# EAGLE board team6 (EAGLE 8.4.1)

Size 100 x 80 mm. Coordinates in mm from the lower left corner, seen from the top.
Outline: 100,80 0,80
Outline: 0,0 1.5,0 1.5,2 4.5,2 4.5,0 42.5,0 42.5,2 45.5,2 45.5,0 47,0 47,28 45.5,28 45.5,26 42.5,26 42.5,28 4.5,28 4.5,26 1.5,26 1.5,28 0,28 0,0
Copper layers (1*16): Top 0.035mm / dielectric 1.5mm / Bottom 0.035mm
Design rules "default": minimum track width 6mil, minimum drill 0.35mm, track to track 6mil, track to pad 6mil, pad to pad 6mil, via to via 6mil, smd to smd 6mil, copper to edge 40mil, drill to drill 6mil, minimum pad ring 10mil, minimum via ring 8mil, stop-mask expansion 4mil, vias tented up to drill 0mil, thermal gap 10mil

## Footprints (pad centres in the part's own frame; a part is rotated, then mirrored left to right if it is on the bottom)
C1206 = smd 1.6 x 1.8: 1 -1.4,0; 2 1.4,0
C1206' = smd 1.8 x 1.45: 1 0,1.4; 2 0,-1.4
C0603 = smd 1 x 0.95: 1 0,0.8; 2 0,-0.8
RCL_C1206 = smd 1.6 x 1.8: 1 -1.4,0; 2 1.4,0
SMB = smd 2.4 x 2.4: A 2.2,0; C -2.2,0
MSOP8 = smd 0.35 x 1: 1 -0.975,-2.05; 2 -0.325,-2.05; 3 0.325,-2.05; 4 0.975,-2.05; 5 0.975,2.05; 6 0.325,2.05; 7 -0.325,2.05; 8 -0.975,2.05
FTDI_DEVICE_SIDE = drill 1.016 pad 1.88 square: P$1 -6.35,0 | drill 1.016 pad 1.88: P$2 -3.81,0; P$3 -1.27,0; P$4 1.27,0; P$5 3.81,0; P$6 6.35,0
JST_CONNECTOR_FEMALE = drill 0.889: + 0,1; - 0,-1
LED_SML0603 = smd 0.8 x 0.8: A 0.75,0; C -0.75,0
WIRELESS-NRF24L01 = drill 1 square: 1 -12.7,6.35 | drill 1: 2 -10.16,6.35; 3 -12.7,3.81; 4 -10.16,3.81; 5 -12.7,1.27; 6 -10.16,1.27; 7 -12.7,-1.27; 8 -10.16,-1.27
SOT23 = smd 1 x 1.4: 1 -0.95,-1.1; 2 0.95,-1.1; 3 0,1.1
0603 = smd 1.1 x 1: 1 -0.85,0; 2 0.85,0
DTSM-6 = smd 1.55 x 1.3: 1 -3.975,2.25; 2 3.975,2.25; 3 -3.975,-2.25; 4 3.975,-2.25
TQFP32-08 = smd 1.27 x 0.559: 1 -4.293,2.8; 2 -4.293,2; 3 -4.293,1.2; 4 -4.293,0.4; 5 -4.293,-0.4; 6 -4.293,-1.2; 7 -4.293,-2; 8 -4.293,-2.8; 17 4.293,-2.8; 18 4.293,-2; 19 4.293,-1.2; 20 4.293,-0.4; 21 4.293,0.4; 22 4.293,1.2; 23 4.293,2; 24 4.293,2.8 | smd 0.559 x 1.27: 9 -2.8,-4.293; 10 -2,-4.293; 11 -1.2,-4.293; 12 -0.4,-4.293; 13 0.4,-4.293; 14 1.2,-4.293; 15 2,-4.293; 16 2.8,-4.293; 25 2.8,4.293; 26 2,4.293; 27 1.2,4.293; 28 0.4,4.293; 29 -0.4,4.293; 30 -1.2,4.293; 31 -2,4.293; 32 -2.8,4.293
GY-521 = drill 0.8 pad 1.778 long: ADO -8.89,-6.35; GND -8.89,6.35; INT -8.89,-8.89; SCL -8.89,3.81; SDA -8.89,1.27; VCC -8.89,8.89; XCL -8.89,-3.81; XDA -8.89,-1.27
SPLITTER = smd 0.102 x 0.102: 1 0,0; 2 0,0
HC49UP = smd 5.334 x 1.93: 1 -4.826,0; 2 4.826,0

## Placement (x,y rotation side)
C1  10uF  [C1206]  16.13,19.18 0 top
C2  10uF  [C1206]  20.07,17.02 90 top
C3  100uF  [C1206']  17.91,7.49 0 top
C4  100nF  [C0603]  31.11,8 270 top
C5  100nF  [C0603]  31.75,14.73 270 bottom
C6  100nF  [C0603]  31.75,11.43 270 bottom
C7  10uF  [C0603]  3.68,24.26 90 bottom
C8  100nF  [C0603]  6.48,23.37 180 bottom
C9  100nF  [C0603]  30.99,25.4 0 bottom
C10  1uF  [C0603]  12.57,16.51 0 top
C12  60pF  [RCL_C1206]  29.21,21.21 0 bottom
C13  60pF  [RCL_C1206]  34.54,21.08 180 bottom
D1  ES2D  [SMB]  33.02,3.05 180 bottom
D2  ES2D  [SMB]  4.57,9.53 0 bottom
D3  ES2D  [SMB]  22.1,7.87 270 bottom
D4  ES2D  [SMB]  9.91,7.62 270 bottom
IC1  MCP1252-33X50  [MSOP8]  16,16.38 90 top
J1  FTDI_DEVICE  [FTDI_DEVICE_SIDE]  22.61,25.91 180 top
JST_MOTOR_1  JST_MOTOR_1  [JST_CONNECTOR_FEMALE]  27.05,3.27 90 top
LED1  [LED_SML0603]  14.73,5.97 0 top
LED2  [LED_SML0603]  35.56,26.29 180 top
LED3  [LED_SML0603]  12.57,25.91 0 top
LED4  [LED_SML0603]  9.27,25.91 0 top
M1  WIRELESS-NRF24L01  [WIRELESS-NRF24L01]  15.05,16.41 0 top
Q1  BSS123  [SOT23]  38.86,3.05 270 bottom
Q2  BSS123  [SOT23]  14.1,7.11 270 bottom
Q3  BSS123  [SOT23]  25.78,6.99 180 bottom
Q4  BSS123  [SOT23]  7.62,13.21 270 bottom
R1  10k  [0603]  38.1,8.26 0 top
R2  510  [0603]  14.73,7.75 180 top
R3  10k  [0603]  37.47,5.59 0 bottom
R4  10k  [0603]  14.22,9.53 0 bottom
R5  10k  [0603]  25.78,9.78 180 bottom
R6  10k  [0603]  8.13,15.75 0 bottom
R7  510  [0603]  38.99,26.29 0 top
R8  510  [0603]  12.83,24.38 0 top
R9  510  [0603]  8.38,24.38 0 top
R10  10k  [0603]  29.34,6.35 180 top
R11  10k  [0603]  33.66,6.35 0 bottom
R13  100k  [0603]  17.27,13.84 0 top
S1  DTSM-6  [DTSM-6]  36.32,4.06 0 top
U1  ATMEGA328P_TQFP  [TQFP32-08]  32.08,13.62 270 top
U3  GY-521MPU6050  [GY-521]  35.12,15.04 180 top
U$2  JST_CONNECTOR_FEMALE  [JST_CONNECTOR_FEMALE]  14.71,3.33 90 top
U$3  JST_CONNECTOR_FEMALE  [JST_CONNECTOR_FEMALE]  2.46,6.1 180 top
U$4  JST_CONNECTOR_FEMALE  [JST_CONNECTOR_FEMALE]  8.52,3.34 90 top
U$5  JST_CONNECTOR_FEMALE  [JST_CONNECTOR_FEMALE]  20.89,3.27 90 top
U$6  SPLITTER  [SPLITTER]  -34.29,71.12 0 top  (outside the outline)
U$7  SPLITTER  [SPLITTER]  -36.83,71.12 0 top  (outside the outline)
U$8  SPLITTER  [SPLITTER]  -39.37,71.12 0 top  (outside the outline)
Y1  8MHz  [HC49UP]  31.88,21.34 0 top

## Library data of the parts
C1 C2 = resistor
C3-C10 = we-rcl
C12 C13 = OPS_Project_6_LIB
D1-D4 = diode
IC1 = microchip-MCP125x-xxx
J1 M1 U3 = quad
JST_MOTOR_1 U$2-U$5 = JST_CONNECTOR_FEMALE. through hole
LED1-LED4 = eagle-ltspice; SPICEMODEL: NONE; SPICEPREFIX: D; SPICETYPE: diode
Q1-Q4 = transistor-small-signal
R1-R11 R13 = SparkFun-Resistors; PROD_ID: RES-09570
S1 = switch-tact
U1 = quad; PROD_ID: IC-09069
U$6-U$8 = splitter
Y1 = SparkFun-Clocks; PROD_ID: XTAL-11706

## Nets
3.3V: C2.1 C4.2 C5.2 C7.1 C8.1 IC1.2 J1.P$4 M1.2 R1.2 R13.1 U1.4 U1.6 U1.18 U3.VCC
3.7V: C1.1 C3.2 D1.C D2.C D3.C D4.C IC1.3 IC1.7 IC1.8 JST_MOTOR_1.+ LED1.A R10.2 U$2.+ U$3.+ U$4.+ U$5.+
AGND: C4.1 R11.1 U1.21 U$6.2
CE: M1.3 U1.24
CSN: M1.4 U1.25
DGND: C1.2 C2.2 C3.1 C5.1 C6.1 C7.2 C8.2 C12.1 C13.1 IC1.4 J1.P$6 M1.1 R2.1 R7.2 R8.2 R9.2 S1.3 U1.3 U1.5 U3.GND U$2.- U$8.2
DTR: C9.1 J1.P$1
GND: U$6.1 U$7.1 U$8.1
LED_1: LED2.A U1.11
LED_2: LED3.A U1.12
LED_3: LED4.A U1.14
MGND: Q1.2 Q2.2 Q3.2 Q4.2 R3.2 R4.2 R5.2 R6.2 U$7.2
MISO: M1.7 U1.16
MOSI: M1.6 U1.15
MOTOR_1: Q1.1 R3.1 U1.1
MOTOR_2: Q2.1 R4.1 U1.9
MOTOR_3: Q4.1 R6.1 U1.10
MOTOR_4: Q3.1 R5.1 U1.13
N$1: D2.A Q2.3 U$3.-
N$2: D1.A JST_MOTOR_1.- Q1.3
N$3: D3.A Q3.3 U$5.-
N$4: D4.A Q4.3 U$4.-
N$5: LED1.C R2.2
N$6: C13.2 U1.7 Y1.2
N$7: C12.2 U1.8 Y1.1
N$9: C6.2 U1.20
N$11: C10.2 IC1.5
N$12: C10.1 IC1.6
N$15: LED3.C R8.1
N$16: LED2.C R7.1
N$17: LED4.C R9.1
PGOOD: IC1.1 R13.2 U1.22
RESET: C9.2 R1.1 S1.1 U1.29
RX: J1.P$3 U1.30
SCK: M1.5 U1.17
SCL: U1.28 U3.SCL
SDA: U1.27 U3.SDA
TX: J1.P$2 U1.31
V_READER: R10.1 R11.2 U1.23

## Tracks (layer width: path | path; a pad name or v marks a point on that pad's centre or on a via)
3.3V  (13 unrouted)
3.7V  (15 unrouted)
AGND  (3 unrouted)
CE  (1 unrouted)
CSN  (1 unrouted)
DGND  (21 unrouted)
DTR  (1 unrouted)
GND  (2 unrouted)
LED_1  (1 unrouted)
LED_2  (1 unrouted)
LED_3  (1 unrouted)
MGND  (8 unrouted)
MISO  (1 unrouted)
MOSI  (1 unrouted)
MOTOR_1  (2 unrouted)
MOTOR_2  (2 unrouted)
MOTOR_3  (2 unrouted)
MOTOR_4  (2 unrouted)
N$1  (2 unrouted)
N$2  (2 unrouted)
N$3  (2 unrouted)
N$4  (2 unrouted)
N$5  (1 unrouted)
N$6  (2 unrouted)
N$7  (2 unrouted)
N$9  (1 unrouted)
N$11  (1 unrouted)
N$12  (1 unrouted)
N$15  (1 unrouted)
N$16  (1 unrouted)
N$17  (1 unrouted)
PGOOD  (2 unrouted)
RESET  (3 unrouted)
RX  (1 unrouted)
SCK  (1 unrouted)
SCL  (1 unrouted)
SDA  (1 unrouted)
TX  (1 unrouted)
V_READER  (2 unrouted)